# Allegro board 808bd.brd
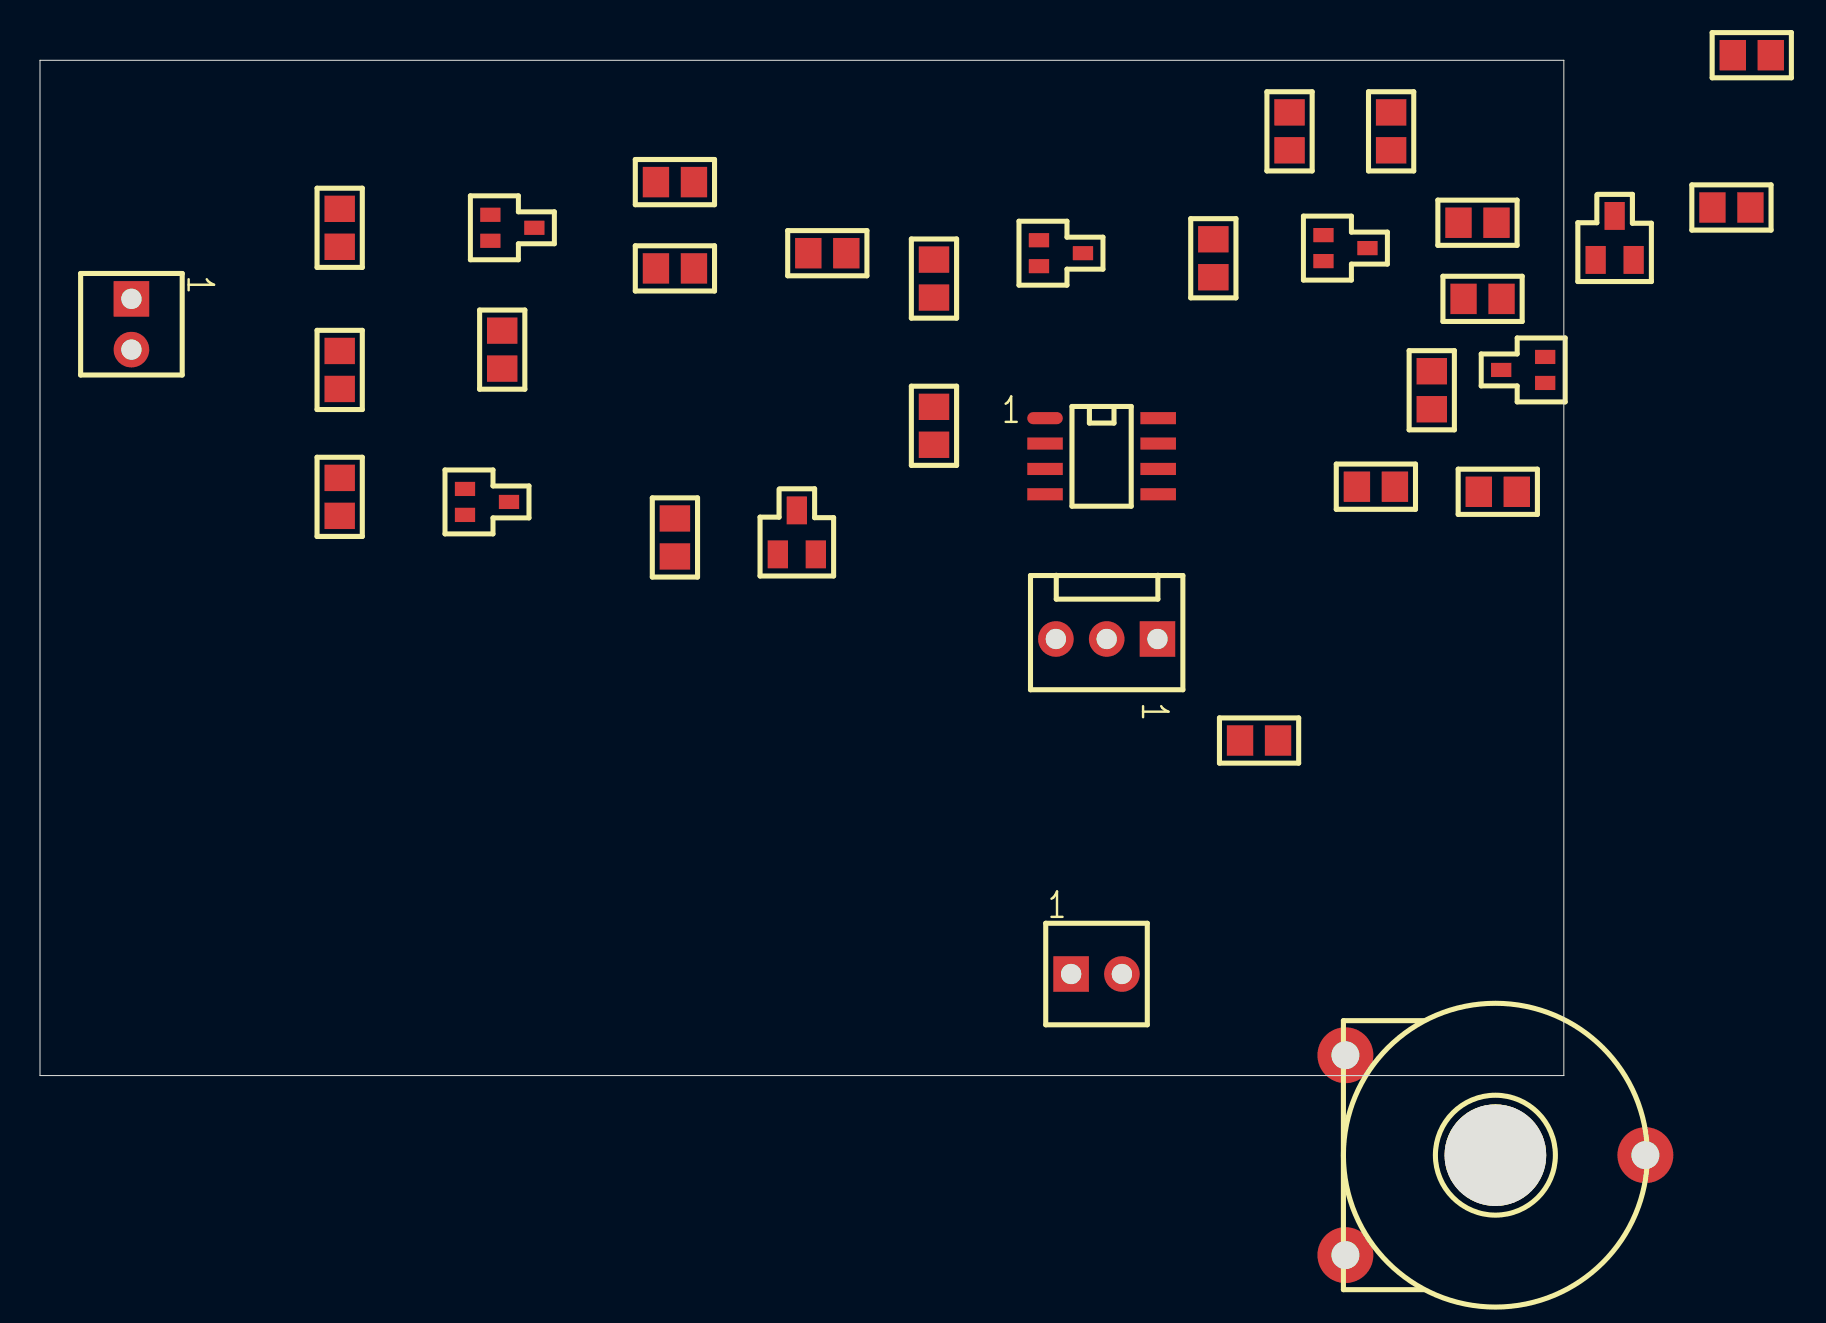
[diagram p0: board, top side]
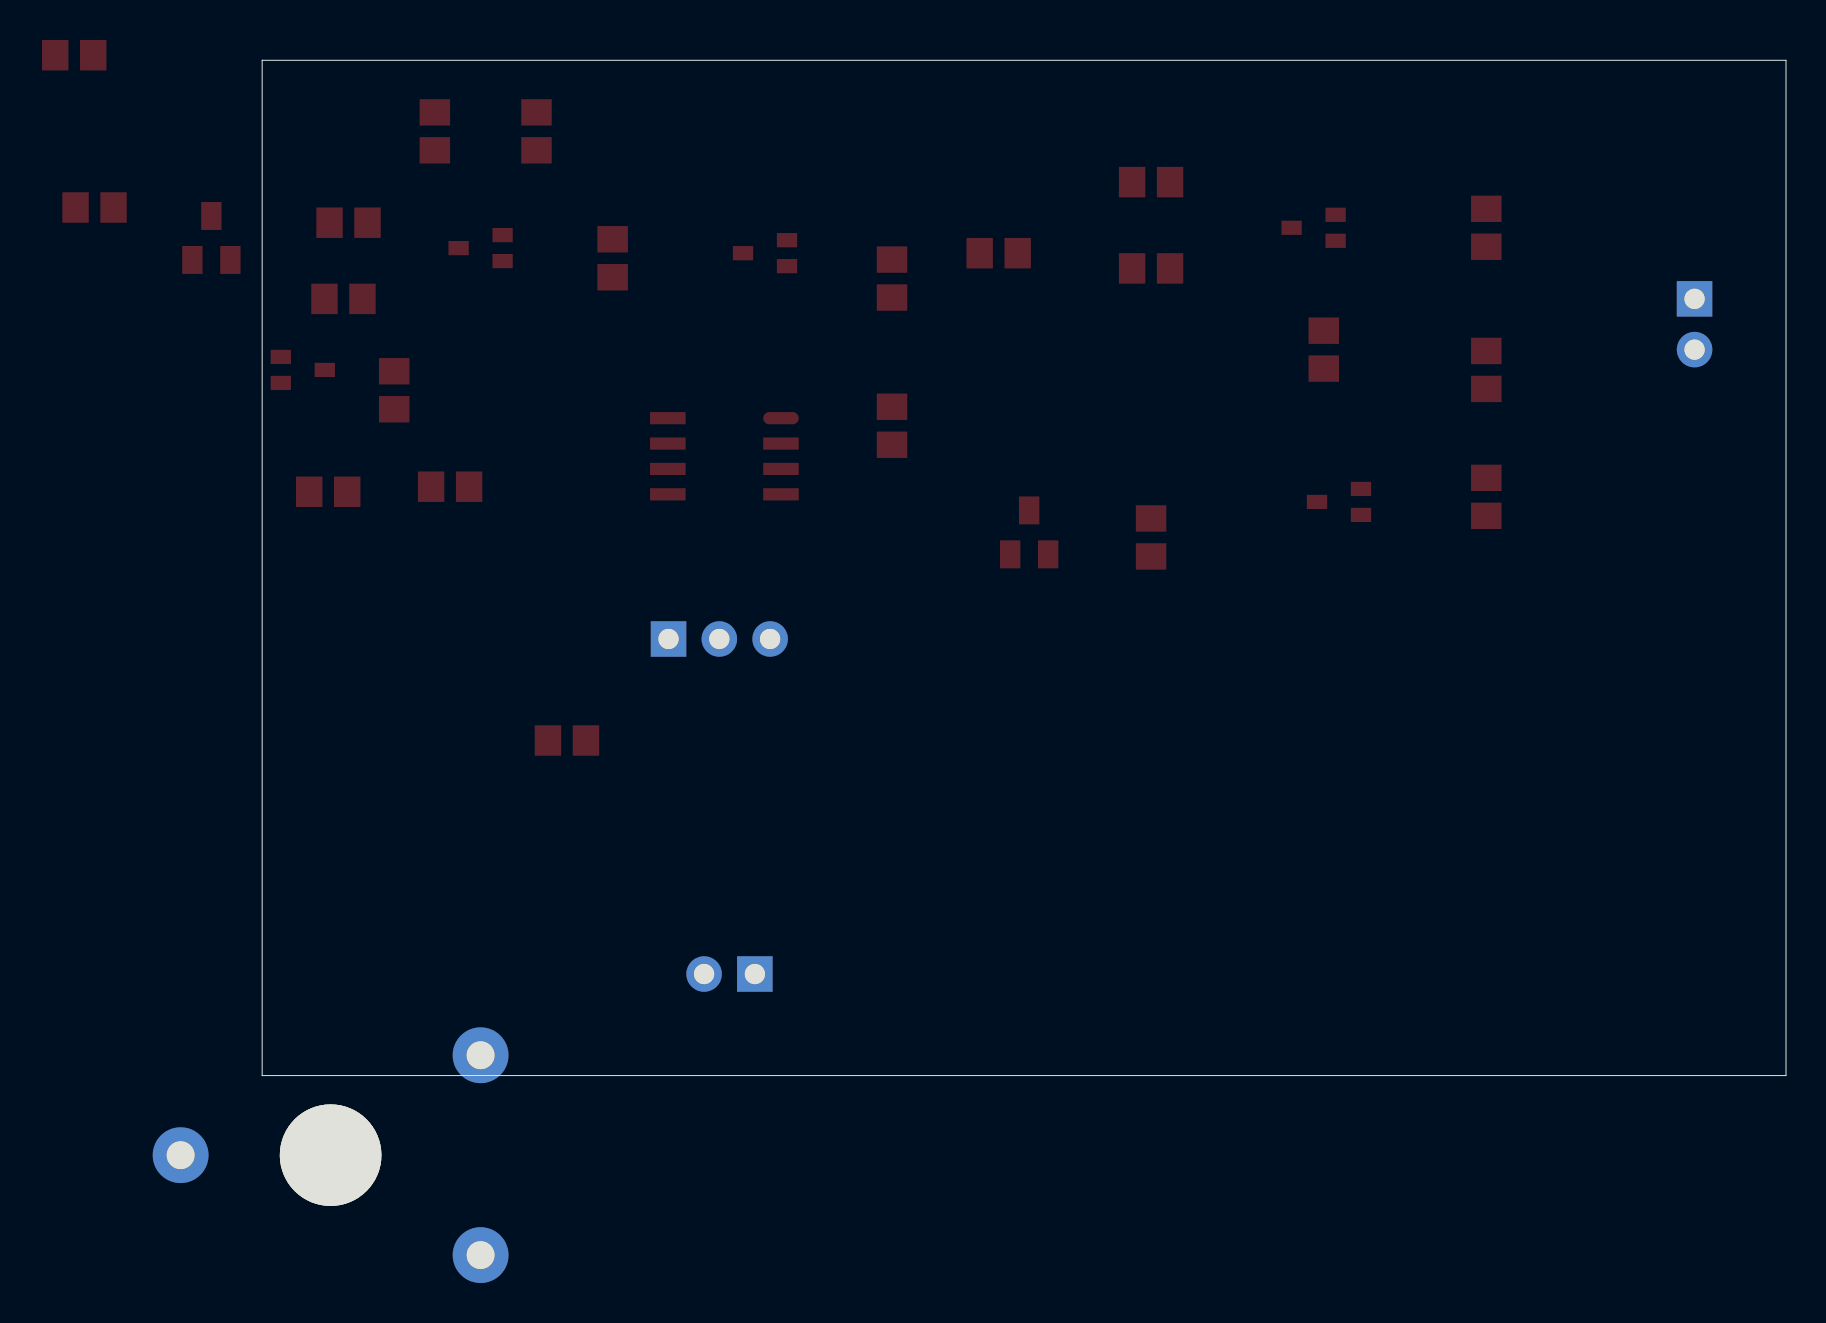
[diagram p1: board, bottom side, seen from below]

Outline 76.2 x 50.8 mm; copper layers: TOP, BOTTOM. Coordinates in mm from the lower left corner of the outline.
Outline path: 0,50.8 76.2,50.8 76.2,0 0,0 0,50.8

## Placement (name value [footprint] x y rotation side)
C1  0.015UF  [CAPC-0805_W]  31.75 44.7 0 top
C2  0.1UF  [CAPC-0805_W]  58.67 40.89 270 top
C3  0.033UF  [CAPC-0805_W]  71.88 42.67 0 top
C4  0.015UF  [CAPC-0805_W]  66.8 29.46 0 top
C5  0.015UF  [CAPC-0805_W]  72.9 29.21 0 top
D1  MMBD4148  [SOT-23_W]  37.85 27.18 90 top
D2  MMBD4148  [SOT-23_W]  78.74 41.91 90 top
J1  640452-2  [CONN-AMP-2PIN-100MIL-ST]  4.57 38.86 270 top
J2  640456-3  [CONN-AMP-3PIN-100MIL-ST]  55.88 21.84 180 top
J3  640452-2  [CONN-AMP-2PIN-100MIL-ST]  51.56 5.08 0 top
Q1  FJX945  [SOT-323_W]  22.35 28.7 0 top
Q2  FJX733  [SOT-323_W]  23.62 42.42 0 top
Q3  FJX945  [SOT-323_W]  51.05 41.15 0 top
Q4  FJX945  [SOT-323_W]  65.28 41.4 0 top
Q5  FJX945  [SOT-323_W]  74.17 35.31 180 top
R1  22K  [RESC-0805_W]  14.99 35.31 90 top
R2  10K  [RESC-0805_W]  14.99 28.96 90 top
R3  4.7K  [RESC-0805_W]  14.99 42.42 270 top
R4  10K  [RESC-0805_W]  23.11 36.32 90 top
R5  100K  [RESC-0805_W]  31.75 40.39 0 top
R6  8.2K  [RESC-0805_W]  39.37 41.15 0 top
R7  2.7K  [RESC-0805_W]  44.7 39.88 90 top
R8  4.7K  [RESC-0805_W]  31.75 26.92 90 top
R9  1.0M  [RESC-0805_W]  62.48 47.24 90 top
R10  22K  [RESC-0805_W]  67.56 47.24 90 top
R11  100K  [RESC-0805_W]  72.14 38.86 0 top
R12  1.0M  [RESC-0805_W]  84.58 43.43 0 top
R13  6.8K  [RESC-0805_W]  69.6 34.29 270 top
R14  1.0M  [RESC-0805_W]  44.7 32.51 270 top
R15  5K  [RES-PT-15XV15]  65.28 1.02 0 top
R16  22K  [RESC-0805_W]  60.96 16.76 0 top
R17  470K  [RESC-0805_W]  85.6 51.05 0 top
U1  LM258D  [SO8]  53.09 30.99 0 top

## Library data of the parts
C1 C4 C5 = C_SMT_X7R_0805: alternate symbols: (CAPC-0805_W_PADS,CAPC-0805_HD); part number: C_SMT_X7R_0805-10000435,0.015UF,X7R,25V,5%,CAPC-0805_W
C2 = C_SMT_X7R_0805: alternate symbols: (CAPC-0805_W_PADS,CAPC-0805_HD); part number: C_SMT_X7R_0805-10000445,0.1UF,X7R,25V,5%,CAPC-0805_W
C3 = C_SMT_X7R_0805: alternate symbols: (CAPC-0805_W_PADS,CAPC-0805_HD); part number: C_SMT_X7R_0805-10000439,0.033UF,X7R,25V,5%,CAPC-0805_W
D1 D2 = D_SMT_SIGNAL_1A3C_SOT-23: alternate symbols: (SOT-23_IPCN,SOT-23W,SOT-23_HD); part number: D_SMT_SIGNAL_1A3C_SOT-23-10004947,MMBD4148,SIGNAL-3PIN,75V,200MA,SOT-23_W
J1 J3 = J_2_ST_AMP_640452: part number: J_2_ST_AMP_640452-10017071,640452-2,CONN-AMP-2PIN-100MIL-ST
J2 = J_3_ST_AMP_640456: part number: J_3_ST_AMP_640456-10017170,640456-3,CONN-AMP-3PIN-100MIL-ST
Q1 Q3-Q5 = Q_NPN_SIGNAL_BEC_SOT-323: alternate symbols: (SOT-323_IPCN,SOT-323_DELTA); part number: Q_NPN_SIGNAL_BEC_SOT-323-10005453,FJX945,NPN SIGNAL,50V,0.15A,SOT-323_W
Q2 = Q_PNP_SIGNAL_BEC_SOT-323: alternate symbols: (SOT-323_IPCN,SOT-323_DELTA); part number: Q_PNP_SIGNAL_BEC_SOT-323-10005646,FJX733,PNP SIGNAL,50V,0.15A,SOT-323_W
R1 R10 R16 = R_SMT_0805: alternate symbols: (RESC-0805_W_PADS,RESC-0805_HD); part number: R_SMT_0805-10006498,22K,TF-SMT0805,1/8W,5%,RESC-0805_W
R2 R4 = R_SMT_0805: alternate symbols: (RESC-0805_W_PADS,RESC-0805_HD); part number: R_SMT_0805-10006490,10K,TF-SMT0805,1/8W,5%,RESC-0805_W
R3 R8 = R_SMT_0805: alternate symbols: (RESC-0805_W_PADS,RESC-0805_HD); part number: R_SMT_0805-10006482,4.7K,TF-SMT0805,1/8W,5%,RESC-0805_W
R5 R11 = R_SMT_0805: alternate symbols: (RESC-0805_W_PADS,RESC-0805_HD); part number: R_SMT_0805-10006514,100K,TF-SMT0805,1/8W,5%,RESC-0805_W
R6 = R_SMT_0805: alternate symbols: (RESC-0805_W_PADS,RESC-0805_HD); part number: R_SMT_0805-10006488,8.2K,TF-SMT0805,1/8W,5%,RESC-0805_W
R7 = R_SMT_0805: alternate symbols: (RESC-0805_W_PADS,RESC-0805_HD); part number: R_SMT_0805-10006476,2.7K,TF-SMT0805,1/8W,5%,RESC-0805_W
R9 R12 R14 = R_SMT_0805: alternate symbols: (RESC-0805_W_PADS,RESC-0805_HD); part number: R_SMT_0805-10006538,1.0M,TF-SMT0805,1/8W,5%,RESC-0805_W
R13 = R_SMT_0805: alternate symbols: (RESC-0805_W_PADS,RESC-0805_HD); part number: R_SMT_0805-10006486,6.8K,TF-SMT0805,1/8W,5%,RESC-0805_W
R15 = R_TRIMMER_PT-15XV15: part number: R_TRIMMER_PT-15XV15-10013689,5K,TRIMMER,1/4W,20%,RES-PT-15XV15
R17 = R_SMT_0805: alternate symbols: (RESC-0805_W_PADS,RESC-0805_HD); part number: R_SMT_0805-10006530,470K,TF-SMT0805,1/8W,5%,RESC-0805_W
U1 = U_LM258D_SO8: alternate symbols: (SO8_WAVE,SO8_WAVE2); part number: U_LM258D_SO8-10019370,LM258D,SO8

## Footprints (pads in the part's own frame, mm; a bottom-side part is the same pattern mirrored in y, then rotated)
CAPC-0805_W
  rect 1.321x1.524 smd: 1(-0.95,0) 2(0.95,0)
CONN-AMP-2PIN-100MIL-ST
  rect 1.778x1.778 hole 1.016: 1(0,0)
  round 1.778 hole 1.016: 2(2.54,0)
CONN-AMP-3PIN-100MIL-ST
  rect 1.778x1.778 hole 1.016: 1(0,0)
  round 1.778 hole 1.016: 2(2.54,0) 3(5.08,0)
RES-PT-15XV15
  round 5.08 hole 7.112 unplated: (7.5,-5)
  round 2.794 hole 1.397: 1(0,0) 2(15,-5) 3(0,-10)
RESC-0805_W
  rect 1.321x1.524 smd: 1(-0.95,0) 2(0.95,0)
SO8
  oval 1.778x0.61 smd: 1(-2.829,1.905)
  rect 1.778x0.61 smd: 2(-2.829,0.635) 3(-2.829,-0.635) 4(-2.829,-1.905) 5(2.829,-1.905) 6(2.829,-0.635) 7(2.829,0.635) 8(2.829,1.905)
SOT-23_W
  rect 1.397x1.016 smd: 1(-1.1,0.95) 2(-1.1,-0.95) 3(1.1,0)
SOT-323_W
  rect 1.016x0.711 smd: 1(-1.1,0.65) 2(-1.1,-0.65) 3(1.1,0)

## Nets
+15V: J2.1 R9.2 R10.2 U1.8
-15V: J2.3 U1.4
GND_SIGNAL: C2.2 D1.1(A) D2.1(A) J2.2 J3.2 Q1.2(E) Q3.2(E) Q4.2(E) Q5.2(E) R2.1 R7.1 R8.1 R16.1
UNNAMED_1_CSMT_I19_1: C1.1 Q2.3(C) R5.1 R6.1
UNNAMED_1_CSMT_I19_2: C1.2 D1.3(C) R5.2 R8.2 U1.3
UNNAMED_1_CSMT_I24_1: C2.1 Q3.3(C) Q4.1(B) R9.1
UNNAMED_1_CSMT_I30_1: C3.1 Q4.3(C) R10.1 R11.1
UNNAMED_1_CSMT_I30_2: C3.2 D2.3(C) R12.2
UNNAMED_1_CSMT_I33_1: C4.1 R14.2 U1.2
UNNAMED_1_CSMT_I33_2: C4.2 C5.1 R12.1 R13.2 R17.1
UNNAMED_1_CSMT_I34_2: C5.2 R14.1 U1.1
UNNAMED_1_J2ST_I70_1: J3.1
UNNAMED_1_J2ST_I71_2: J1.2 R1.2
UNNAMED_1_QNPNSIGNAL_I15_B: Q1.1(B) R1.1 R2.2
UNNAMED_1_QNPNSIGNAL_I15_C: Q1.3(C) R4.1
UNNAMED_1_QNPNSIGNAL_I18_B: Q3.1(B) R6.2 R7.2
UNNAMED_1_QNPNSIGNAL_I38_B: Q5.1(B) R11.2
UNNAMED_1_QNPNSIGNAL_I38_C: Q5.3(C) R13.1 R15.2
UNNAMED_1_QPNPSIGNAL_I16_B: Q2.1(B) R3.1 R4.2
UNNAMED_1_QPNPSIGNAL_I16_E: J1.1 Q2.2(E) R3.2
UNNAMED_1_RSMT_I4_2: U1.6
UNNAMED_1_RSMT_I43_2: R15.1 R16.2
UNNAMED_1_RSMT_I52_2: R17.2 U1.7
UNNAMED_1_RSMT_I53_2: U1.5

Pads without a net: D1 2; D2 2; R15 3
